# EAGLE board Bot (EAGLE 5.11)
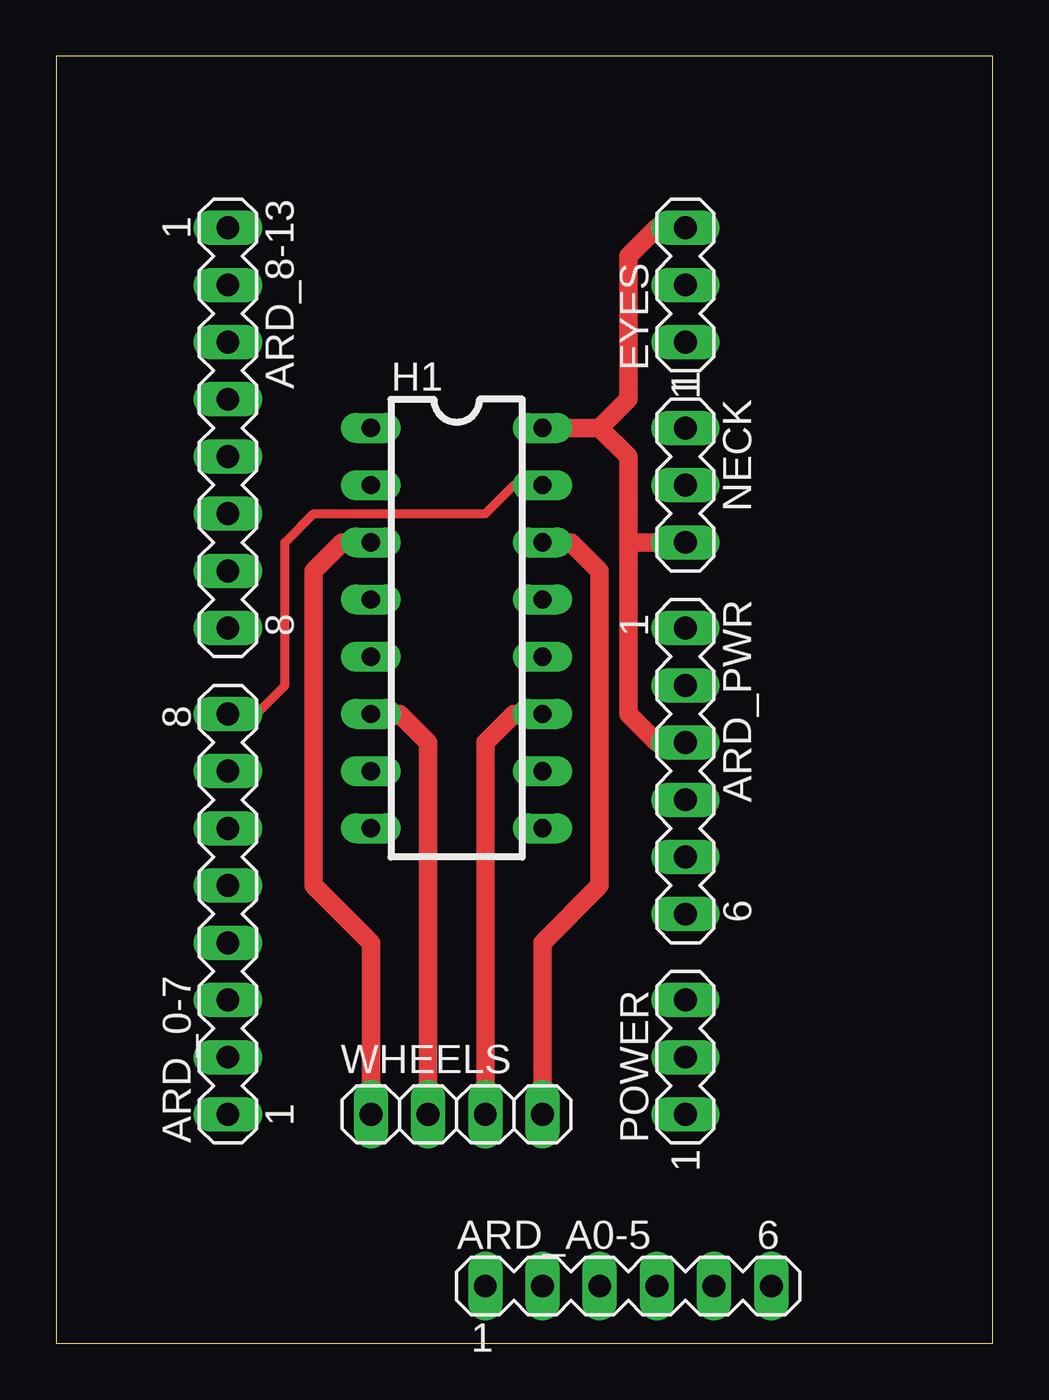
[diagram p0: board, top side]
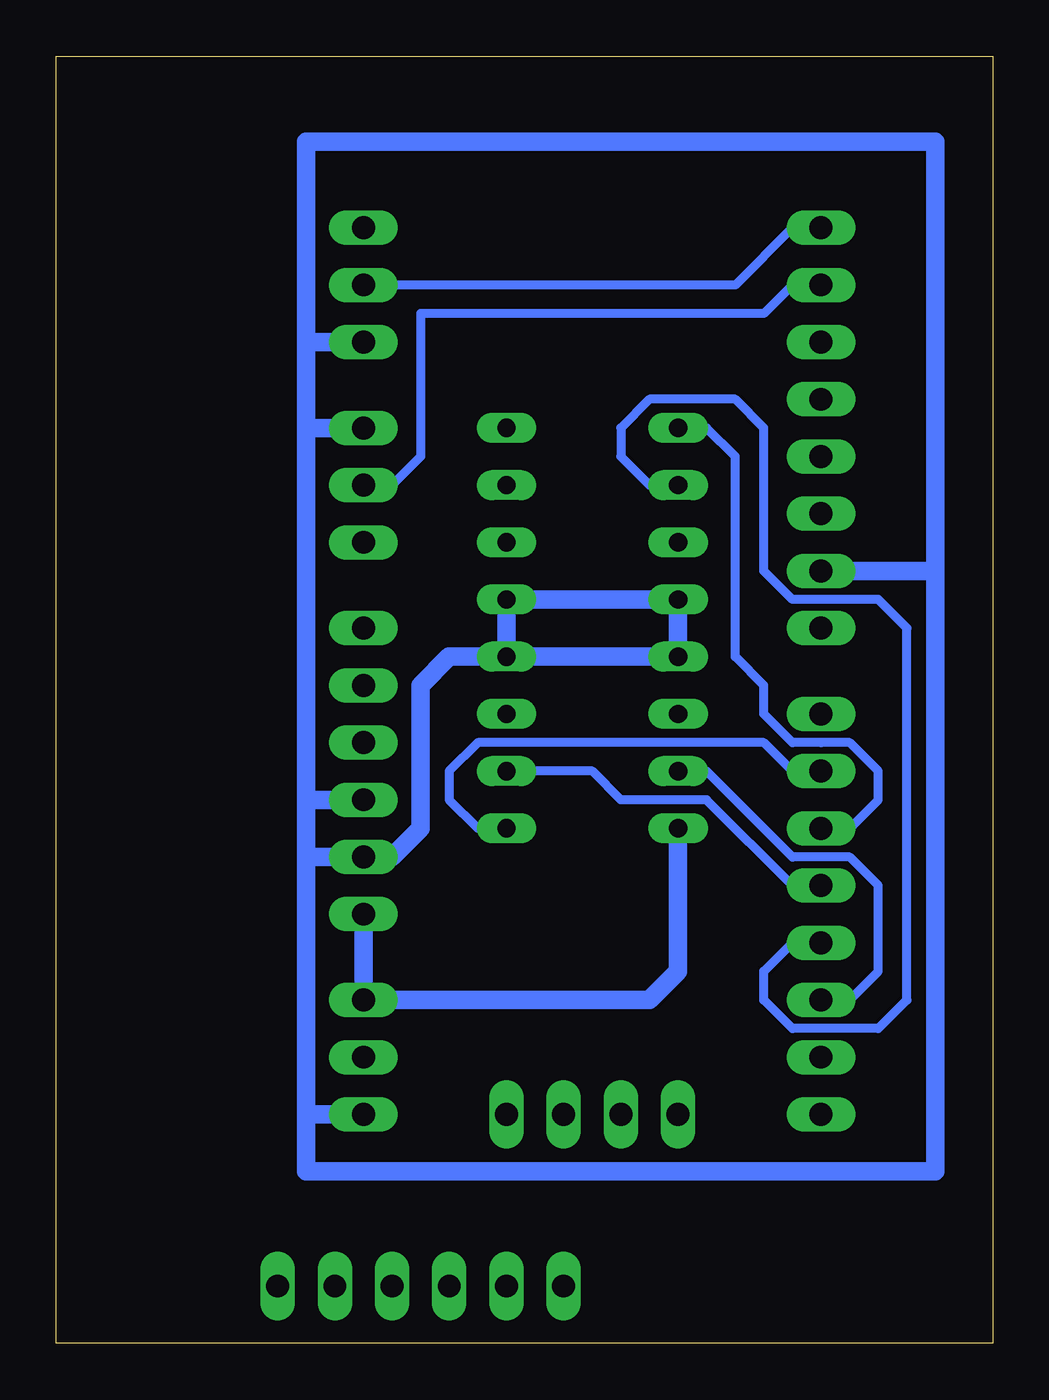
[diagram p1: board, bottom side, seen from below]

Size 41.58 x 57.14 mm. Coordinates in mm from the lower left corner, seen from the top.
Outline: 0,0 41.58,0 41.58,57.14 0,57.14 0,0
Copper layers (1*16): Top 0.035mm / dielectric 1.5mm / Bottom 0.035mm
Design rules "default": minimum track width 10mil, minimum drill 24mil, track to track 8mil, track to pad 8mil, pad to pad 8mil, via to via 8mil, smd to smd 8mil, copper to edge 40mil, drill to drill 8mil, minimum pad ring 10mil, minimum via ring 8mil, stop-mask expansion 4mil, vias tented up to drill 0mil, thermal gap 10mil

## Footprints (pad centres in the part's own frame; a part is rotated, then mirrored left to right if it is on the bottom)
MA08-1 = drill 1.016 long: 1 -8.89,0; 2 -6.35,0; 3 -3.81,0; 4 -1.27,0; 5 1.27,0; 6 3.81,0; 7 6.35,0; 8 8.89,0
MA06-1 = drill 1.016 long: 1 -6.35,0; 2 -3.81,0; 3 -1.27,0; 4 1.27,0; 5 3.81,0; 6 6.35,0
MA03-1 = drill 1.016 long: 1 -2.54,0; 2 0,0; 3 2.54,0
DIL16 = drill 0.813 long: 1 -8.89,-3.81; 2 -6.35,-3.81; 3 -3.81,-3.81; 4 -1.27,-3.81; 5 1.27,-3.81; 6 3.81,-3.81; 7 6.35,-3.81; 8 8.89,-3.81; 9 8.89,3.81; 10 6.35,3.81; 11 3.81,3.81; 12 1.27,3.81; 13 -1.27,3.81; 14 -3.81,3.81; 15 -6.35,3.81; 16 -8.89,3.81
1X04 = drill 1.016 long: 1 -3.81,0; 2 -1.27,0; 3 1.27,0; 4 3.81,0

## Placement (x,y rotation side)
ARD_0-7  [MA08-1]  7.62,19.05 90 top
ARD_8-13  [MA08-1]  7.62,40.64 270 top
ARD_A0-5  [MA06-1]  25.4,2.54 0 top
ARD_PWR  [MA06-1]  27.94,25.4 270 top
EYES  [MA03-1]  27.94,46.99 90 top
H1  SN754410DIL  [DIL16]  17.78,31.75 270 top
NECK  [MA03-1]  27.94,38.1 270 top
POWER  [MA03-1]  27.94,12.7 90 top
WHEELS  [1X04]  17.78,10.16 0 top

## Library data of the parts
ARD_0-7 ARD_8-13 ARD_A0-5 ARD_PWR EYES NECK POWER = con-lstb; OC_FARNELL: unknown; OC_NEWARK: unknown
H1 = BotParts
WHEELS = pinhead

## Nets
3.3V: ARD_PWR.2
+5V: ARD_PWR.3 EYES.3 H1.16 NECK.3
AREF: ARD_8-13.8
D0_RX: ARD_0-7.1
D1_TX: ARD_0-7.2
D2: ARD_0-7.3 H1.7
D3: ARD_0-7.4 H1.2
D4: ARD_0-7.5 H1.10
D5_PWM: ARD_0-7.6 H1.1
D6_PWM: ARD_0-7.7 H1.9
D7: ARD_0-7.8 H1.15
D8: ARD_8-13.1 EYES.2
D9_PWM: ARD_8-13.2 NECK.2
D10_PWM: ARD_8-13.3
D11: ARD_8-13.4
GND: ARD_8-13.7 ARD_PWR.4 ARD_PWR.5 EYES.1 H1.4 H1.5 H1.12 H1.13 NECK.1 POWER.1
M1A: H1.3 WHEELS.1
M1B: H1.6 WHEELS.2
M2A: H1.11 WHEELS.3
M2B: H1.14 WHEELS.4
RESET: ARD_PWR.1
VCC: ARD_PWR.6 H1.8 POWER.3

## Tracks (layer width: path | path; a pad name or v marks a point on that pad's centre or on a via)
+5V
  Top 0.813: ARD_PWR.3 26.67,26.67 25.4,27.94 25.4,35.56 | 24.13,40.64 25.4,39.37 25.4,35.56 | 24.13,40.64 H1.16 | 25.4,35.56 NECK.3 | EYES.3 26.67,49.53 25.4,48.26 25.4,41.91 24.13,40.64
D2
  Bottom 0.406: ARD_0-7.3 6.35,15.24 5.08,16.51 5.08,20.32 6.35,21.59 8.89,21.59 12.7,25.4 H1.7
D3
  Bottom 0.406: ARD_0-7.4 8.89,17.78 10.16,16.51 10.16,15.24 8.89,13.97 5.08,13.97 3.81,15.24 3.81,31.75 5.08,33.02 8.89,33.02 10.16,34.29 10.16,40.64 11.43,41.91 15.24,41.91 16.51,40.64 16.51,39.37 15.24,38.1 H1.2
D4
  Bottom 0.406: H1.10 17.78,25.4 16.51,24.13 12.7,24.13 8.89,20.32 ARD_0-7.5
D5_PWM
  Bottom 0.406: H1.1 12.7,40.64 11.43,39.37 11.43,30.48 10.16,29.21 10.16,27.94 8.89,26.67 7.62,26.67 6.35,26.67 5.08,25.4 5.08,24.13 6.35,22.86 ARD_0-7.6
D6_PWM
  Bottom 0.406: H1.9 22.86,22.86 24.13,24.13 24.13,25.4 22.86,26.67 10.16,26.67 8.89,25.4 ARD_0-7.7
D7
  Top 0.406: ARD_0-7.8 8.89,27.94 10.16,29.21 10.16,35.56 11.43,36.83 19.05,36.83 20.32,38.1 H1.15
D8
  Bottom 0.406: ARD_8-13.1 8.89,49.53 11.43,46.99 EYES.2
D9_PWM
  Bottom 0.406: ARD_8-13.2 8.89,46.99 10.16,45.72 25.4,45.72 25.4,39.37 26.67,38.1 NECK.2
GND
  Bottom 0.813: 30.48,21.59 30.48,24.13 | 30.48,24.13 30.48,40.64 | 30.48,44.45 30.48,40.64 | 30.48,44.45 30.48,53.34 2.54,53.34 2.54,34.29 | H1.12 H1.5 H1.4 H1.13 H1.12 | 30.48,21.59 ARD_PWR.5 26.67,21.59 25.4,22.86 25.4,29.21 24.13,30.48 H1.12 | 30.48,24.13 ARD_PWR.4 | 30.48,10.16 POWER.1 | 30.48,10.16 30.48,21.59 | 2.54,34.29 2.54,7.62 30.48,7.62 30.48,10.16 | 2.54,34.29 ARD_8-13.7 | 30.48,44.45 EYES.1 | 30.48,40.64 NECK.1
M1A
  Top 0.813: WHEELS.1 13.97,17.78 11.43,20.32 11.43,34.29 12.7,35.56 H1.3
M1B
  Top 0.813: WHEELS.2 16.51,26.67 15.24,27.94 H1.6
M2A
  Top 0.813: WHEELS.3 19.05,26.67 20.32,27.94 H1.11
M2B
  Top 0.813: WHEELS.4 21.59,17.78 24.13,20.32 24.13,34.29 22.86,35.56 H1.14
VCC
  Bottom 0.813: ARD_PWR.6 POWER.3 15.24,15.24 13.97,16.51 H1.8